# EAGLE board MOTOR (EAGLE 9.5.2)
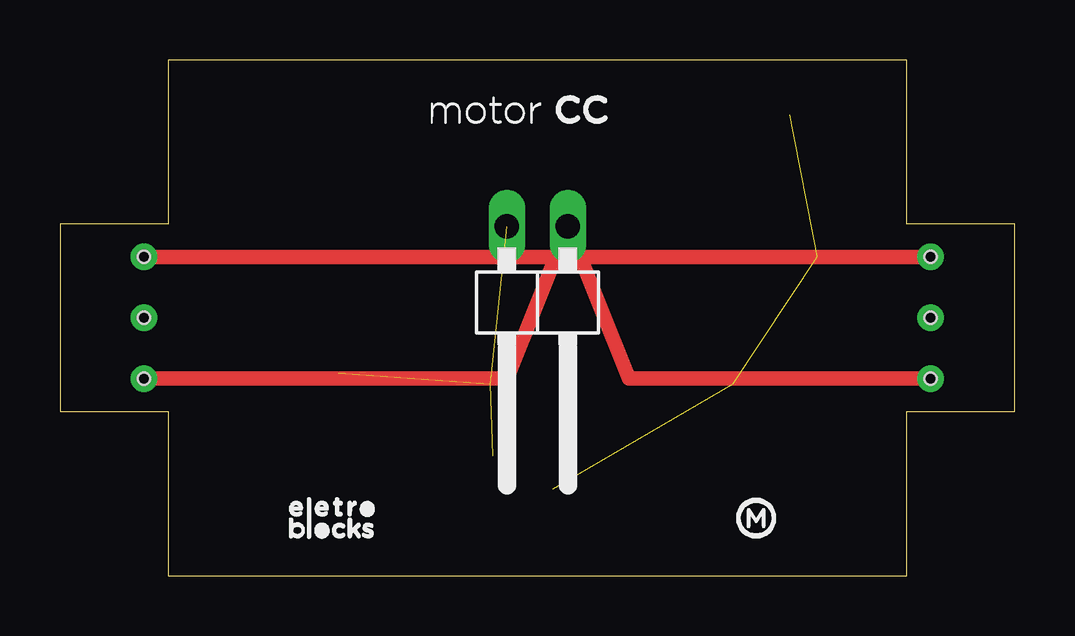
[diagram p0: board, top side]
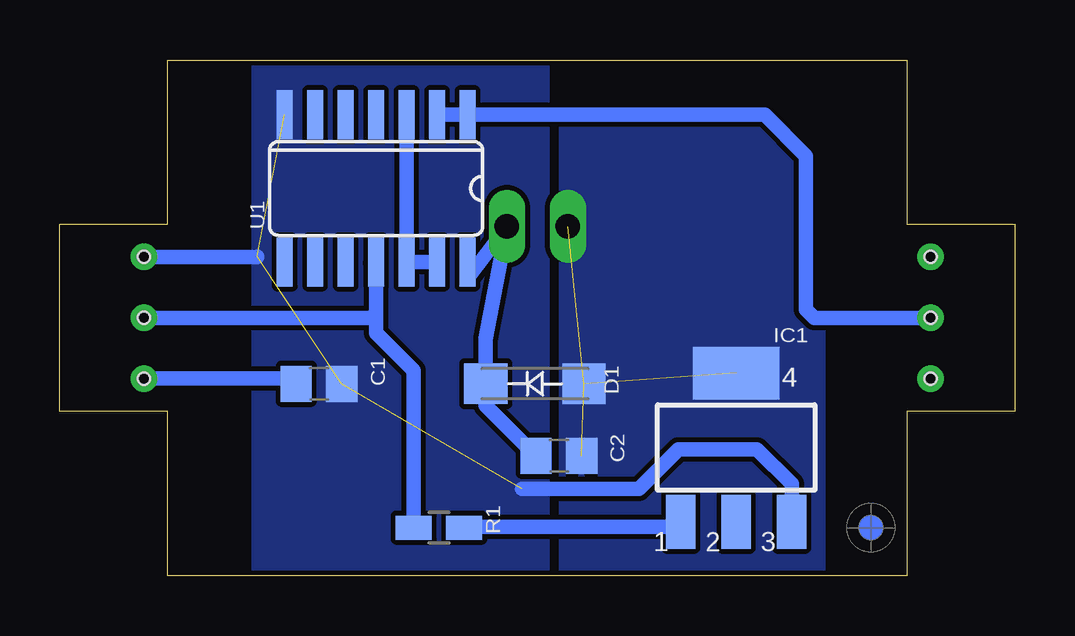
[diagram p1: board, bottom side, seen from below]

Size 39.8 x 21.5 mm. Coordinates in mm from the lower left corner, seen from the top.
Outline: 4.5,0 35.3,0 35.3,6.85 39.8,6.85 39.8,14.65 35.3,14.65 35.3,21.5 4.5,21.5 4.5,14.65 0,14.65 0,6.85 4.5,6.85 4.5,0
Copper layers (1*16): Top 0.035mm / dielectric 1.5mm / Bottom 0.035mm
Design rules "default *": minimum track width 6mil, minimum drill 0.35mm, track to track 8mil, track to pad 8mil, pad to pad 8mil, via to via 8mil, smd to smd 8mil, copper to edge 8mil, drill to drill 8mil, minimum pad ring 10mil, minimum via ring 8mil, stop-mask expansion 4mil, vias tented up to drill 0mil, thermal gap 0mil

## Footprints (pad centres in the part's own frame; a part is rotated, then mirrored left to right if it is on the bottom)
C0805 = smd 1.3 x 1.5: 1 -0.95,0; 2 0.95,0
SMA-DO214AC = smd 1.8 x 1.7: A -2.05,0; K 2.05,0
SOT223 = smd 1.219 x 2.235: 1 -2.311,-3.099; 2 0,-3.099; 3 2.311,-3.099 | smd 3.6 x 2.2: 4 0,3.099
3CONECTOR = drill 0.6: 1 0,2.54; 2 0,0; 3 0,-2.54 | hole 0.5: 0,2.54; 0,0; 0,-2.54
1X02/90 = drill 1.016 long: 1 -1.27,-3.81; 2 1.27,-3.81
R0805W = smd 1.5 x 1: 1 -1.052,0; 2 1.052,0
SO14 = smd 0.66 x 2.032: 1 -3.81,-3.073; 2 -2.54,-3.073; 3 -1.27,-3.073; 4 0,-3.073; 5 1.27,-3.073; 6 2.54,-3.073; 7 3.81,-3.073; 8 3.81,3.073; 9 2.54,3.073; 10 1.27,3.073; 11 0,3.073; 12 -1.27,3.073; 13 -2.54,3.073; 14 -3.81,3.073

## Placement (x,y rotation side)
C1  100nF  [C0805]  29,8 0 bottom
C2  100nF  [C0805]  19,5 0 bottom
D1  1N4007 ( DO-214AC(SMA))  [SMA-DO214AC]  20,8 180 bottom
IC1  BCP56  [SOT223]  11.61,5.34 0 bottom
J1  CONECTOR_MACHO  [3CONECTOR]  3.5,10.75 0 top
J2  CONECTOR_FEMEA  [3CONECTOR]  36.3,10.75 180 top
JP2  [1X02/90]  19.9,10.75 180 top
R1  1k  [R0805W]  24,2 180 bottom
U1  74HC132  [SO14]  26.62,16.14 180 bottom
U$1  [FIDUCIAL_G10]  6,2 0 bottom

## Library data of the parts
C1 C2 = rcl; SPICEPREFIX: C
D1 = diode
IC1 = transistor-neu-to92
J1 J2 = Eletroblocks Lib
JP2 = pinhead
R1 = rcl; SPICEPREFIX: R
U1 = 40xx
U$1 = dicons

## Nets
GND: C1.2 IC1.3 J1.1 J2.3 U1.7
N$1: U1.3 U1.12 U1.13
N$2: IC1.1 R1.1
PLANO: C2.2 D1.A IC1.4 JP2.2
SIGNAL_IN: J1.2 U1.1 U1.2
SIGNAL_OUT: J2.2 R1.2 U1.11
VCC: C1.1 C2.1 D1.K J1.3 J2.1 JP2.1 U1.14

## Tracks (layer width: path | path; a pad name or v marks a point on that pad's centre or on a via)
GND  (3 unrouted)
  Top 0.61: J1.1 J2.3
  Bottom 0.61: J2.3 31.59,13.29 31.58,13.3 | J1.1 3.65,13.44 | IC1.3 9.3,3.82 10.74,5.26 14.01,5.26 15.66,3.61 20.55,3.61
  pour Bottom: 19.4,0 31.8,0 31.8,21.5 19.4,21.5
N$1
  Bottom 0.61: U1.13 U1.12 U1.3
N$2
  Bottom 0.61: IC1.1 14.12,2.04 22.91,2.04 R1.1
PLANO  (3 unrouted)
  pour Bottom: 18.9,-0.1 18.9,21.5 8,21.5 8,-0.1
SIGNAL_IN
  Bottom 0.61: 3.6,10.85 J1.2 8.35,10.75 8.7,11.1 8.7,17.5 10.42,19.22 U1.1 U1.2
SIGNAL_OUT
  Bottom 0.61: 26.67,13.02 U1.11 26.62,10.95 | 26.62,10.95 26.62,10.12 25.05,8.55 R1.2 | J2.2 26.82,10.75 26.62,10.95
VCC
  Top 0.61: J1.3 18.63,8.21 JP2.1 23.71,8.21 J2.1
  Bottom 0.61: J2.1 30.16,8.21 C1.1 | 22.83,13.09 U1.14 22.81,12.39 JP2.1 22.05,9.87 D1.K 22.05,7.1 C2.1

## Text on the board
bNames: IC1